# Altium PCB AS504D_Pcb.PcbDoc
Units mm, origin at the board's own origin, x right, y up, seen from the top; angles counter-clockwise.
Board outline 39.75 x 39.5 mm, 2 copper layers (Top Layer, Bottom Layer); 54 components, 7 nets, 234 pads, 0 vias.
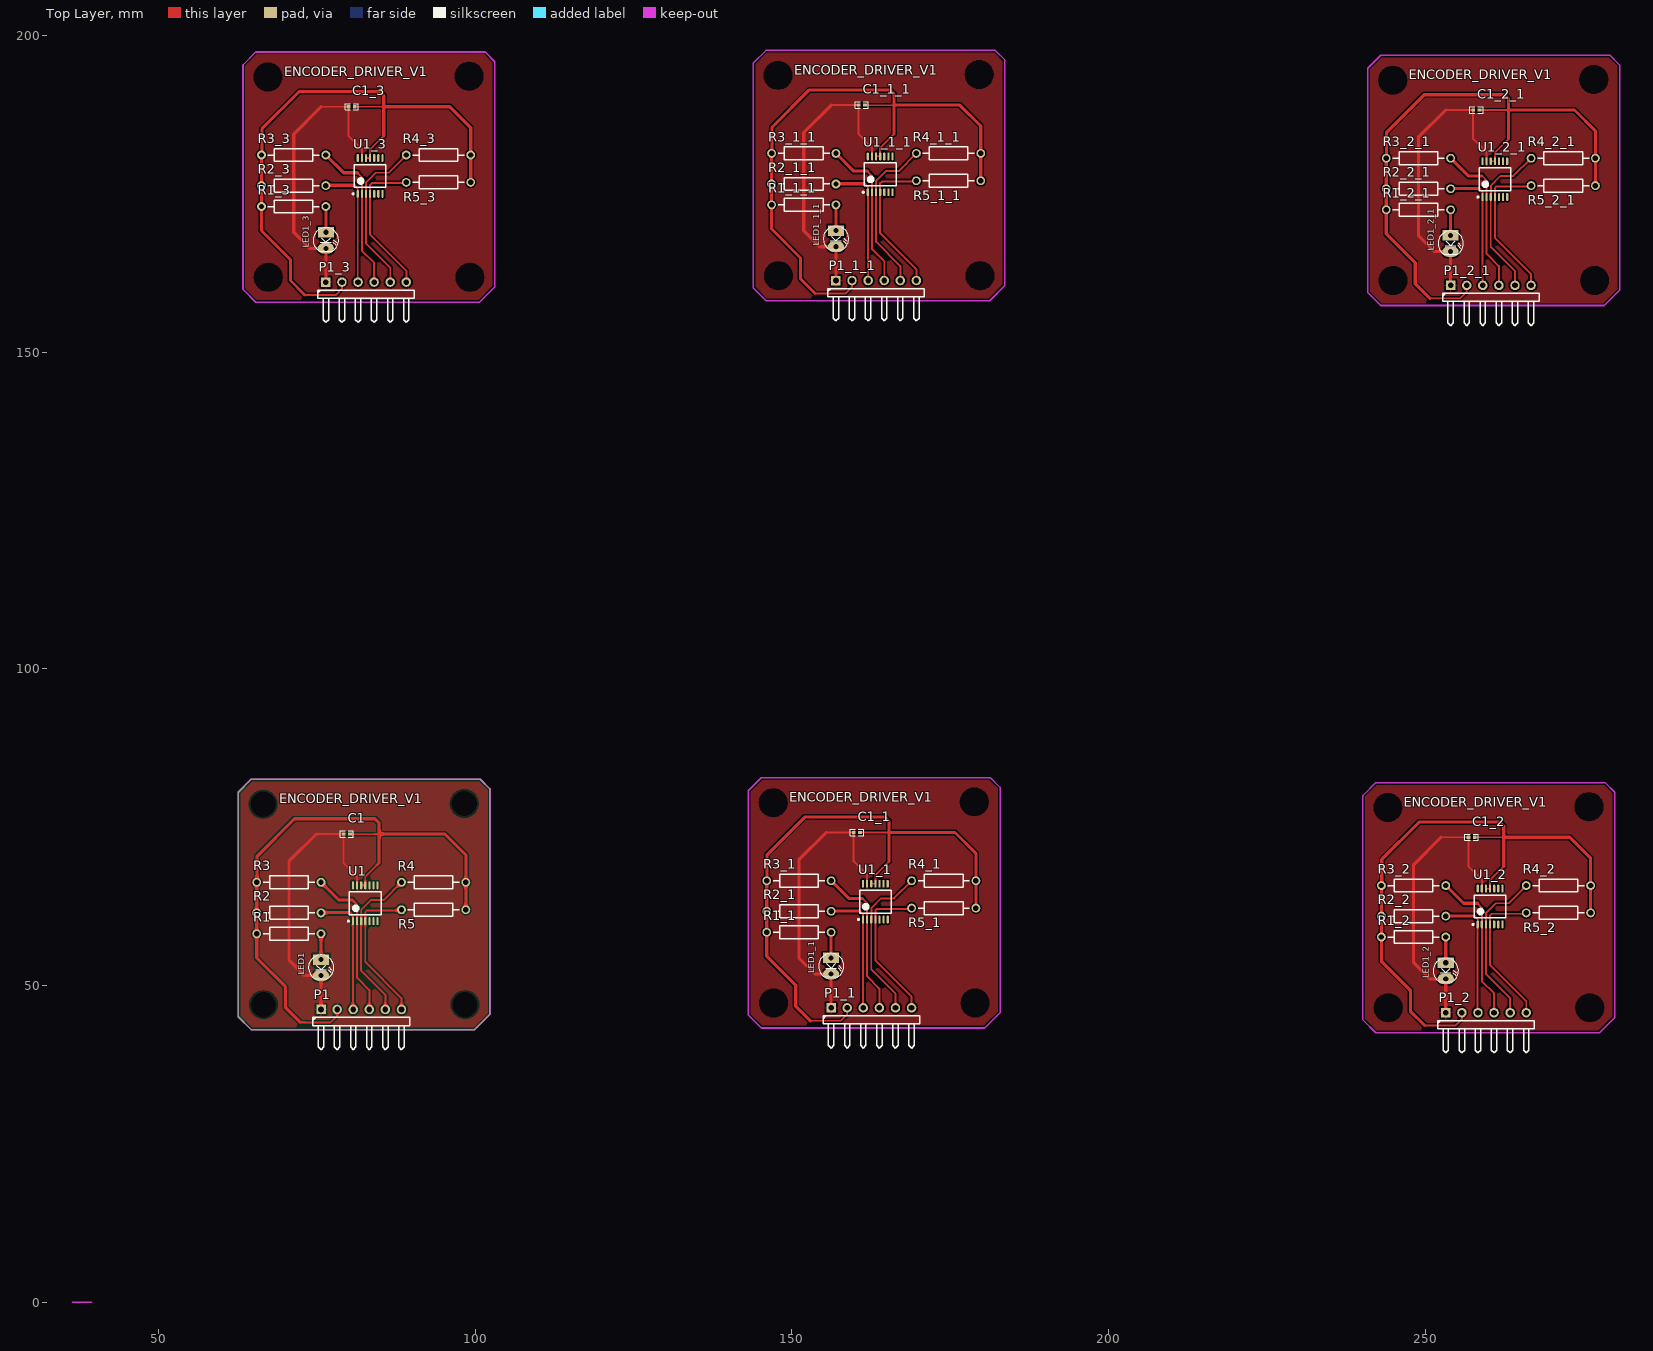
[diagram p0: Top Layer view]
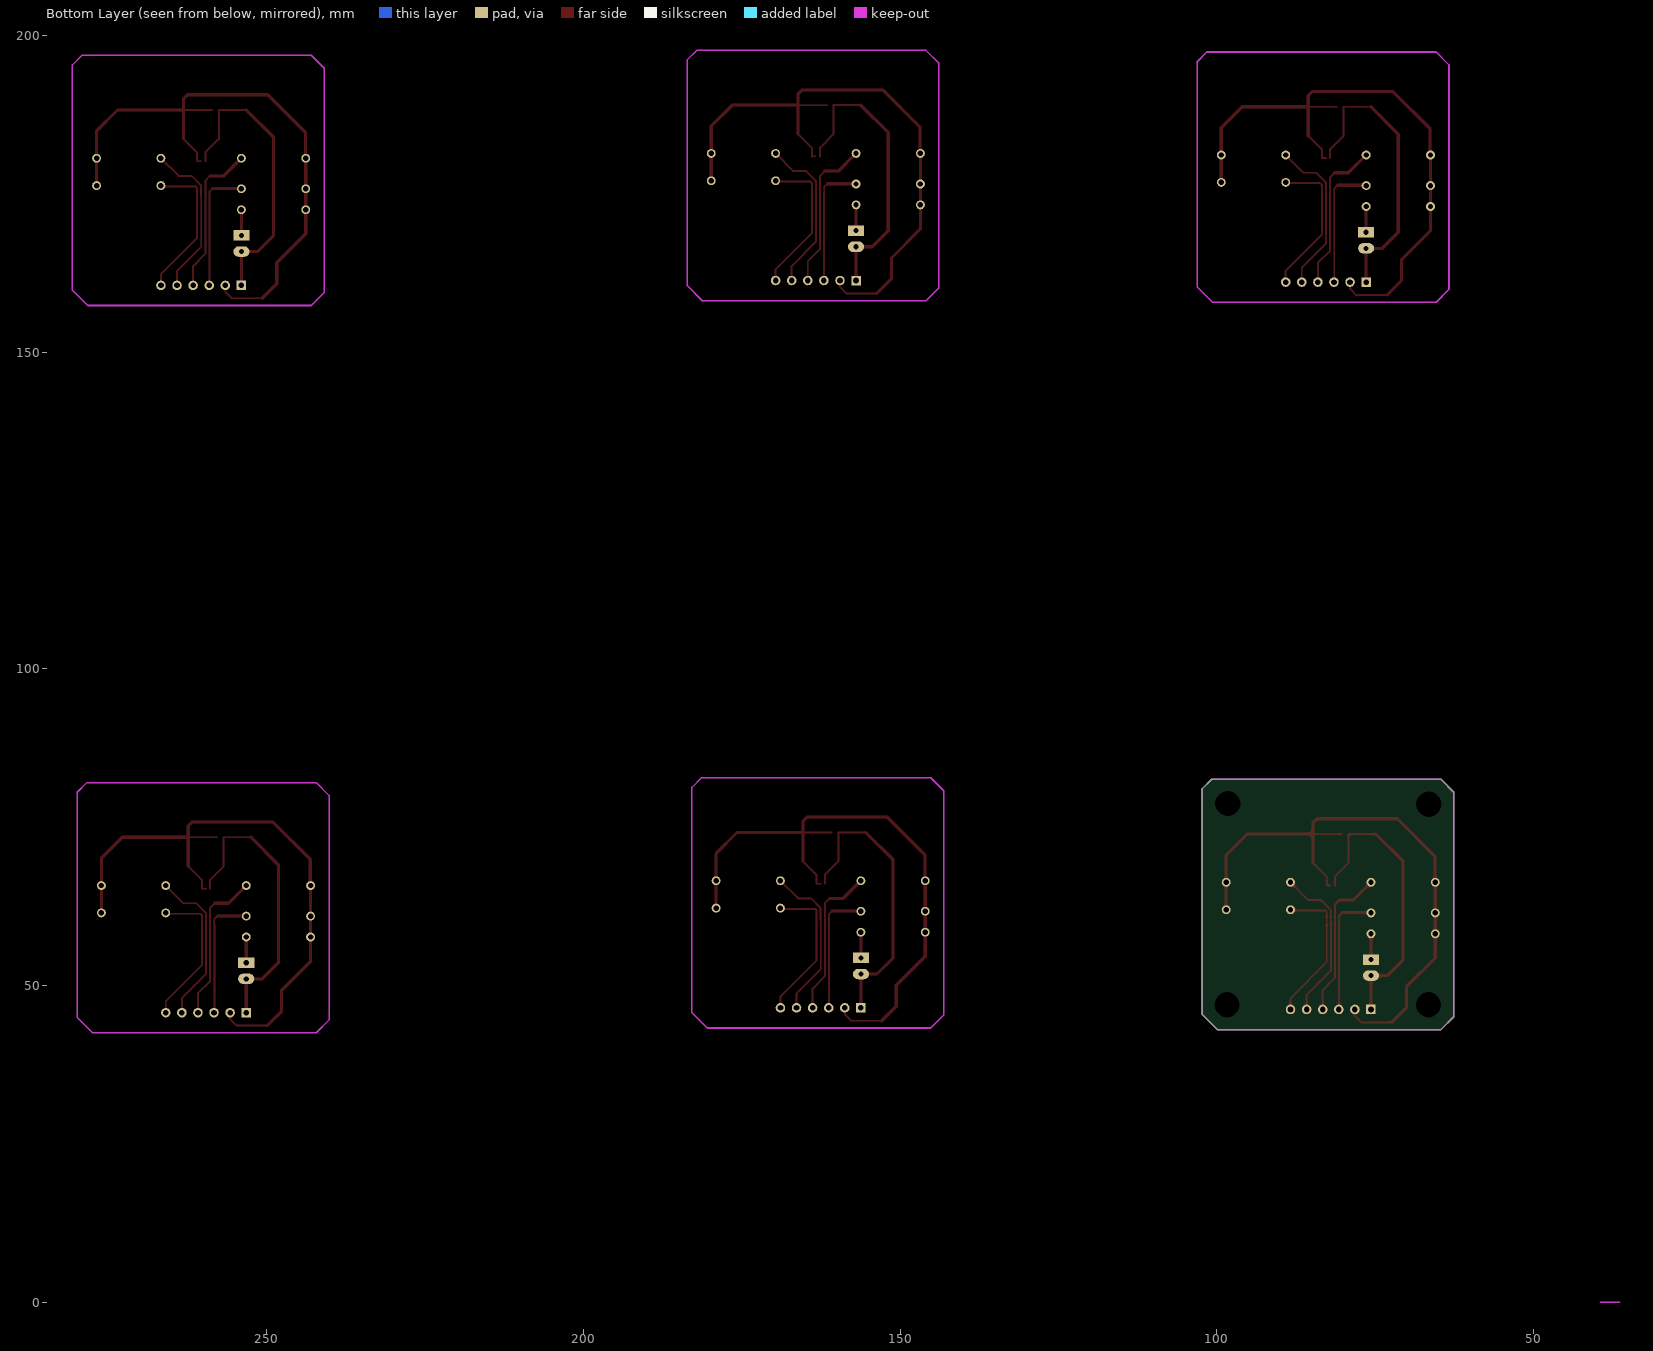
[diagram p1: Bottom Layer view, seen from below]

## Layer stack, top to bottom
Top Solder: solder mask 0.0102, Solder Resist, Dk 3.5
Top Layer: signal copper 0.0356
Dielectric1: dielectric 0.32, FR-4, Dk 4.8
Bottom Layer: signal copper 0.0356
Bottom Solder: solder mask 0.0102, Solder Resist, Dk 3.5

## Board outline
62.611,45.085 64.643,43.053 99.949,43.053 102.362,45.466 102.362,81.026 100.838,82.55 64.643,82.55 62.611,80.518

## Design rules (kind name [scope] priority, off if disabled: settings)
Clearance [All] p1: gap=0.254 ignorepadtopadclearanceinfootprint=FALSE except(0: Arc-Hole Track-Hole SMDPad-Hole THPad-Hole Via-Hole Fill-Hole Poly-Hole Region-Hole Text-Hole)
PolygonConnect [All] p1: connectstyle=Relief reliefconductorwidth=0.254 reliefentries=4 polygonreliefangle="90 Angle" airgapwidth=0.254
RoutingVias [All] p1: holewidth=0.711 width=1.27 viastyle="Through Hole" minholewidth=0.711 minwidth=1.27 maxholewidth=0.711 maxwidth=1.27
SolderMaskExpansion [All] p1: expansion=0.102
Width [All] p1: maxlimit=0.254 minlimit=0.254 preferedwidth=0.254
30 further rules are at their usual default settings.

## Classes and differential pairs
component class AS504D_Sch: C1 LED1 P1 R1 R2 R3 R4 R5 U1

## Components (designator, comment, footprint, x,y, rotation, side; value= is the part's Value field where it differs from the comment)
C1 "104" CAPC1005X55N 79.764,73.914 r0 top value=0.1uF
C1_1 "104" CAPC1005X55N 160.282,74.168 r0 top value=0.1uF (schematic designator C1)
C1_1_1 "104" CAPC1005X55N 161.044,188.976 r0 top value=0.1uF (schematic designator C1)
C1_2 "104" CAPC1005X55N 257.31,73.406 r0 top value=0.1uF (schematic designator C1)
C1_2_1 "104" CAPC1005X55N 258.072,188.214 r0 top value=0.1uF (schematic designator C1)
C1_3 "104" CAPC1005X55N 80.526,188.722 r0 top value=0.1uF (schematic designator C1)
LED1 "LED" LED-3 75.692,54.102 r270 top value="LED 3 ly Single Colour"
LED1_1 "LED" LED-3 156.21,54.356 r270 top value="LED 3 ly Single Colour" (schematic designator LED1)
LED1_1_1 "LED" LED-3 156.972,169.164 r270 top value="LED 3 ly Single Colour" (schematic designator LED1)
LED1_2 "LED" LED-3 253.238,53.594 r270 top value="LED 3 ly Single Colour" (schematic designator LED1)
LED1_2_1 "LED" LED-3 254,168.402 r270 top value="LED 3 ly Single Colour" (schematic designator LED1)
LED1_3 "LED" LED-3 76.454,168.91 r270 top value="LED 3 ly Single Colour" (schematic designator LED1)
P1 "Header 6H" HDR1X6H 75.692,46.228 r0 top
P1_1 "Header 6H" HDR1X6H 156.21,46.482 r0 top (schematic designator P1)
P1_1_1 "Header 6H" HDR1X6H 156.972,161.29 r0 top (schematic designator P1)
P1_2 "Header 6H" HDR1X6H 253.238,45.72 r0 top (schematic designator P1)
P1_2_1 "Header 6H" HDR1X6H 254,160.528 r0 top (schematic designator P1)
P1_3 "Header 6H" HDR1X6H 76.454,161.036 r0 top (schematic designator P1)
R1 "Res2" AXIAL-0.4 70.612,58.166 r180 top value=510R
R1_1 "Res2" AXIAL-0.4 151.13,58.42 r180 top value=510R (schematic designator R1)
R1_1_1 "Res2" AXIAL-0.4 151.892,173.228 r180 top value=510R (schematic designator R1)
R1_2 "Res2" AXIAL-0.4 248.158,57.658 r180 top value=510R (schematic designator R1)
R1_2_1 "Res2" AXIAL-0.4 248.92,172.466 r180 top value=510R (schematic designator R1)
R1_3 "Res2" AXIAL-0.4 71.374,172.974 r180 top value=510R (schematic designator R1)
R2 "Res2" AXIAL-0.4 70.612,61.468 r180 top value=4.7K
R2_1 "Res2" AXIAL-0.4 151.13,61.722 r180 top value=4.7K (schematic designator R2)
R2_1_1 "Res2" AXIAL-0.4 151.892,176.53 r180 top value=4.7K (schematic designator R2)
R2_2 "Res2" AXIAL-0.4 248.158,60.96 r180 top value=4.7K (schematic designator R2)
R2_2_1 "Res2" AXIAL-0.4 248.92,175.768 r180 top value=4.7K (schematic designator R2)
R2_3 "Res2" AXIAL-0.4 71.374,176.276 r180 top value=4.7K (schematic designator R2)
R3 "Res2" AXIAL-0.4 70.612,66.294 r180 top value=4.7K
R3_1 "Res2" AXIAL-0.4 151.13,66.548 r180 top value=4.7K (schematic designator R3)
R3_1_1 "Res2" AXIAL-0.4 151.892,181.356 r180 top value=4.7K (schematic designator R3)
R3_2 "Res2" AXIAL-0.4 248.158,65.786 r180 top value=4.7K (schematic designator R3)
R3_2_1 "Res2" AXIAL-0.4 248.92,180.594 r180 top value=4.7K (schematic designator R3)
R3_3 "Res2" AXIAL-0.4 71.374,181.102 r180 top value=4.7K (schematic designator R3)
R4 "Res2" AXIAL-0.4 93.472,66.294 r0 top value=4.7K
R4_1 "Res2" AXIAL-0.4 173.99,66.548 r0 top value=4.7K (schematic designator R4)
R4_1_1 "Res2" AXIAL-0.4 174.752,181.356 r0 top value=4.7K (schematic designator R4)
R4_2 "Res2" AXIAL-0.4 271.018,65.786 r0 top value=4.7K (schematic designator R4)
R4_2_1 "Res2" AXIAL-0.4 271.78,180.594 r0 top value=4.7K (schematic designator R4)
R4_3 "Res2" AXIAL-0.4 94.234,181.102 r0 top value=4.7K (schematic designator R4)
R5 "Res2" AXIAL-0.4 93.472,61.976 r0 top value=4.7K
R5_1 "Res2" AXIAL-0.4 173.99,62.23 r0 top value=4.7K (schematic designator R5)
R5_1_1 "Res2" AXIAL-0.4 174.752,177.038 r0 top value=4.7K (schematic designator R5)
R5_2 "Res2" AXIAL-0.4 271.018,61.468 r0 top value=4.7K (schematic designator R5)
R5_2_1 "Res2" AXIAL-0.4 271.78,176.276 r0 top value=4.7K (schematic designator R5)
R5_3 "Res2" AXIAL-0.4 94.234,176.784 r0 top value=4.7K (schematic designator R5)
U1 "AS5047D" TSSOP14 82.677,62.992 r90 top
U1_1 "AS5047D" TSSOP14 163.195,63.246 r90 top (schematic designator U1)
U1_1_1 "AS5047D" TSSOP14 163.957,178.054 r90 top (schematic designator U1)
U1_2 "AS5047D" TSSOP14 260.223,62.484 r90 top (schematic designator U1)
U1_2_1 "AS5047D" TSSOP14 260.985,177.292 r90 top (schematic designator U1)
U1_3 "AS5047D" TSSOP14 83.439,177.8 r90 top (schematic designator U1)

## Footprints (in the part's own frame and the unit in brackets; to place one, negate y for a bottom-side part, rotate by r counter-clockwise, add the part's x,y. Pads: shape width x height; smd on the part's side, far side on the other; paste and mask are expansions set on the pad)
AXIAL-0.4 [mm] "Axial Device, Thru-Hole; 2 Leads; 0.4 in Pin Spacing"
  round 1.4 hole 0.85: 1(-5.08,0) 2(5.08,0)
  silkscreen extent -4.06,-1.02 4.06,1.02
CAPC1005X55N [mm] "Chip Capacitor, Body 1.0x0.5mm, EIA 0402, IPC Medium Density"
  round 0.2 on Mech15: 0(0,0)
  rrect20% 0.6x0.5 smd: 1(-0.5,0) 2(0.5,0)
  Top Layer pour cut-out: -0.325,0.375 -0.2,0.5 0.2,0.5 0.325,0.375 0.325,-0.375 0.2,-0.5 -0.2,-0.5 -0.325,-0.375
  silkscreen extent -1.05,-0.5 1.05,0.5, body extent -0.52,-0.27 0.53,0.28, height 0.55
HDR1X6H [mm] "Connector; Header; 6 Position; Right Angle"
  rect 1.5x1.5 hole 0.9: 1(0,0)
  round 1.5 hole 0.9: 2(2.54,0) 3(5.08,0) 4(7.62,0) 5(10.16,0) 6(12.7,0)
  silkscreen extent -1.27,-6.35 13.97,-1.27
LED-3 [mil] "LED 2 PIN, 3ly Only colour"
  rect 65x100 hole 32: 1(0,0)
  oval 65x100 hole 32: 2(100,0)
  silkscreen extent -29,-78 118,79, body extent -25,-75 113,75, height 217
TSSOP14 [mm] "TSSOP, 14-Leads, Body 5.00x4.40mm, Pitch 0.65mm, IPC High Density"
  oval 1.25x0.35 smd: 1(-2.825,1.95) 2(-2.825,1.3) 3(-2.825,0.65) 4(-2.825,0) 5(-2.825,-0.65) 6(-2.825,-1.3) 7(-2.825,-1.95) 8(2.825,-1.95) 9(2.825,-1.3) 10(2.825,-0.65) 11(2.825,0) 12(2.825,0.65) 13(2.825,1.3) 14(2.825,1.95)
  silkscreen extent -2.95,-2.5 1.8,2.8, body extent -3.23,-2.55 3.23,2.55, height 1.25

## Part data
C1 C1_1 C1_1_1 C1_2 C1_2_1 C1_3: library part CN2, "Cap np 104 => 105pF"
LED1 LED1_1 LED1_1_1 LED1_2 LED1_2_1 LED1_3: "LED Single colour Green and Red"
P1 P1_1 P1_1_1 P1_2 P1_2_1 P1_3: "Header, 6-Pin, Right Angle", LatestRevisionDate=17-Jul-2002, LatestRevisionNote="Re-released for DXP Platform.", Publisher="Altium Limited"
R1 R1_1 R1_1_1 R1_2 R1_2_1 R1_3 R2 R2_1 R2_1_1 R2_2 R2_2_1 R2_3 R3 R3_1 R3_1_1 R3_2 R3_2_1 R3_3 R4 R4_1 R4_1_1 R4_2 R4_2_1 R4_3 R5 R5_1 R5_1_1 R5_2 R5_2_1 R5_3: "Resistor", LatestRevisionDate=17-Jul-2002, LatestRevisionNote="Re-released for DXP Platform.", PackageDescription="Axial Device, Thru-Hole; 2 Leads; 0.4 in Pin Spacing", PackageReference=AXIAL-0.4, Published=8-Jun-2000, Publisher="Altium Limited"
U1 U1_1 U1_1_1 U1_2 U1_2_1 U1_3: BOM_Manufacturer Part=?, Supplier Part Number 1=AS5047D-ATSMTR-ND, spicePre=U, Supplier 1=Digi-Key

## Free pads (board coordinates)
  round 1.524 hole 4: 0(66.548,78.613) 0(66.611,46.99) 0(67.31,193.421) 0(67.373,161.798) 0(98.298,78.74) 0(98.425,46.99) 0(99.06,193.548) 0(99.187,161.798) 0(147.066,78.867) 0(147.129,47.244) 0(147.828,193.675) 0(147.891,162.052) 0(178.816,78.994) 0(178.943,47.244) 0(179.578,193.802) 0(179.705,162.052) 0(244.094,78.105) 0(244.157,46.482) 0(244.856,192.913) 0(244.919,161.29) 0(275.844,78.232) 0(275.971,46.482) 0(276.606,193.04) 0(276.733,161.29)

## Nets (pads, with @x,y where several pads share a name; then routed paths per layer and width w, separated by ;. In a path a pad name is that pad's centre, name@x,y a point inside that pad or via, vN(x,y) a via of type N, cw(c..) or ccw(c..) an arc to the next point about the centre after c; other vN are vias at no path point)
CLK: P1.4 R3.1 U1.2 | length 24.5
  Top Layer w0.3: 80.645,63.5 81.377,62.768 U1.2 81.377,51.211 83.312,49.276 P1.4
  Top Layer w0.5: R3.1 78.486,63.5 80.645,63.5
CSN: P1.3 R2.1 U1.1 | length 20
  Top Layer w0.254: U1.1 80.727,61.005
  Top Layer w0.3: 80.219,61.513 80.727,61.005 ; P1.3@80.727,46.228 U1.1
  Top Layer w0.5: R2.1@75.692,61.513 80.219,61.513
GND: C1.1 LED1.2 P1.1 U1.13 | length 46.4
  Top Layer w0.3: 74.93,73.914 79.256,73.914 79.256,69.334 81.377,67.213 U1.13
  Top Layer w0.5: 74.93,73.914 70.612,69.596 70.612,54.102 73.152,51.562 LED1.2 P1.1
MISO: P1.5 R4.1 U1.3 | length 25.5
  Top Layer w0.254: U1.3 U1.3@82.042,60.182
  Top Layer w0.3: U1.3 82.027,52.339 85.852,48.514 P1.5 ; U1.3@82.042,60.182 82.042,61.976 83.566,63.5 85.598,63.5 R4.1
MOSI: P1.6 R5.1 U1.4 | length 23.6
  Top Layer w0.3: P1.6 88.392,48.006 82.677,53.721 U1.4 82.677,61.595 82.931,61.849 R5.1@88.392,61.849
NetLED1_1: LED1.1 R1.1 | length 4.1
  Top Layer w0.5: LED1.1 R1.1
VDD3V3: C1.2 P1.2 R1.2 R2.2 R3.2 R4.2 R5.2 U1.11 U1.12 | length 98
  Top Layer w0.254: R3.2 R3.2@65.596,66.358 ; C1.2 84.836,73.914 ; U1.12 U1.11
  Top Layer w0.3: 72.39,44.196 77.216,44.196 78.232,45.212 P1.2 ; U1.11 82.677,67.183 84.836,69.342
  Top Layer w0.5: R3.2 R2.2 R1.2 65.532,54.356 70.104,49.784 70.104,46.482 72.39,44.196 ; R3.2@65.596,66.358 65.596,70.421 71.501,76.327 84.201,76.327 84.836,75.692 84.836,73.914 ; 84.836,69.342 84.836,73.914 ; R5.2 R4.2 98.552,70.612 95.25,73.914 84.836,73.914
pads on no net: C1.0 C1_1.0 C1_1.1 C1_1.2 C1_1_1.0 C1_1_1.1 C1_1_1.2 C1_2.0 C1_2.1 C1_2.2 C1_2_1.0 C1_2_1.1 C1_2_1.2 C1_3.0 C1_3.1 C1_3.2 LED1_1.1 LED1_1.2 LED1_1_1.1 LED1_1_1.2 LED1_2.1 LED1_2.2 LED1_2_1.1 LED1_2_1.2 LED1_3.1 LED1_3.2 P1_1.1 P1_1.2 P1_1.3 P1_1.4 P1_1.5 P1_1.6 P1_1_1.1 P1_1_1.2 P1_1_1.3 P1_1_1.4 P1_1_1.5 P1_1_1.6 P1_2.1 P1_2.2 P1_2.3 P1_2.4 P1_2.5 P1_2.6 P1_2_1.1 P1_2_1.2 P1_2_1.3 P1_2_1.4 P1_2_1.5 P1_2_1.6 P1_3.1 P1_3.2 P1_3.3 P1_3.4 P1_3.5 P1_3.6 R1_1.1 R1_1.2 R1_1_1.1 R1_1_1.2 R1_2.1 R1_2.2 R1_2_1.1 R1_2_1.2 R1_3.1 R1_3.2 R2_1.1 R2_1.2 R2_1_1.1 R2_1_1.2 R2_2.1 R2_2.2 R2_2_1.1 R2_2_1.2 R2_3.1 R2_3.2 R3_1.1 R3_1.2 R3_1_1.1 R3_1_1.2 R3_2.1 R3_2.2 R3_2_1.1 R3_2_1.2 R3_3.1 R3_3.2 R4_1.1 R4_1.2 R4_1_1.1 R4_1_1.2 R4_2.1 R4_2.2 R4_2_1.1 R4_2_1.2 R4_3.1 R4_3.2 R5_1.1 R5_1.2 R5_1_1.1 R5_1_1.2 R5_2.1 R5_2.2 R5_2_1.1 R5_2_1.2 R5_3.1 R5_3.2 U1.5 U1.6 U1.7 U1.8 U1.9 U1.10 U1.14 U1_1.1 U1_1.2 U1_1.3 U1_1.4 U1_1.5 U1_1.6 U1_1.7 U1_1.8 U1_1.9 U1_1.10 U1_1.11 U1_1.12 U1_1.13 U1_1.14 U1_1_1.1 U1_1_1.2 U1_1_1.3 U1_1_1.4 U1_1_1.5 U1_1_1.6 U1_1_1.7 U1_1_1.8 U1_1_1.9 U1_1_1.10 U1_1_1.11 U1_1_1.12 U1_1_1.13 U1_1_1.14 U1_2.1 U1_2.2 U1_2.3 U1_2.4 U1_2.5 U1_2.6 U1_2.7 U1_2.8 U1_2.9 U1_2.10 U1_2.11 U1_2.12 U1_2.13 U1_2.14 U1_2_1.1 U1_2_1.2 U1_2_1.3 U1_2_1.4 U1_2_1.5 U1_2_1.6 U1_2_1.7 U1_2_1.8 U1_2_1.9 U1_2_1.10 U1_2_1.11 U1_2_1.12 U1_2_1.13 U1_2_1.14 U1_3.1 U1_3.2 U1_3.3 U1_3.4 U1_3.5 U1_3.6 U1_3.7 U1_3.8 U1_3.9 U1_3.10 U1_3.11 U1_3.12 U1_3.13 U1_3.14
copper on no net: | length 1210
  Top Layer w0.254: 66.294,181.102 66.358,181.165 ; 81.026,188.722 85.598,188.722 ; 81.489,174.975 81.489,175.813 ; 82.789,174.975 82.804,174.99 ; 82.789,180.625 83.439,180.625 ; 146.05,66.548 146.113,66.611 ; 146.812,181.356 146.875,181.419 ; 160.782,74.168 165.354,74.168 ; 161.245,60.421 161.245,61.259 ; 161.544,188.976 166.116,188.976 ; 162.007,175.229 162.007,176.067 ; 162.545,60.421 162.56,60.436 ; 162.545,66.071 163.195,66.071 ; 163.307,175.229 163.322,175.244 ; 163.307,180.879 163.957,180.879 ; 243.078,65.786 243.141,65.849 ; 243.84,180.594 243.903,180.657 ; 257.81,73.406 262.382,73.406 ; 258.273,59.659 258.273,60.497 ; 258.572,188.214 263.144,188.214 ; 259.035,174.467 259.035,175.305 ; 259.573,59.659 259.588,59.674 ; 259.573,65.309 260.223,65.309 ; 260.335,174.467 260.35,174.482 ; 260.335,180.117 260.985,180.117
  Top Layer w0.3: 73.152,159.004 77.978,159.004 78.994,160.02 78.994,161.036 ; 75.692,188.722 80.018,188.722 80.018,184.142 82.139,182.021 82.139,180.625 ; 80.981,176.321 81.489,175.813 ; 81.407,178.308 82.139,177.576 82.139,174.975 82.139,166.019 84.074,164.084 84.074,161.036 ; 81.489,161.036 81.489,174.975 ; 82.789,174.975 82.789,167.147 86.614,163.322 86.614,161.036 ; 82.804,174.99 82.804,176.784 84.328,178.308 86.36,178.308 89.154,181.102 ; 83.439,180.625 83.439,181.991 85.598,184.15 ; 89.154,161.036 89.154,162.814 83.439,168.529 83.439,174.975 83.439,176.403 83.693,176.657 89.154,176.657 ; 152.908,44.45 157.734,44.45 158.75,45.466 158.75,46.482 ; 153.67,159.258 158.496,159.258 159.512,160.274 159.512,161.29 ; 155.448,74.168 159.774,74.168 159.774,69.588 161.895,67.467 161.895,66.071 ; 156.21,188.976 160.536,188.976 160.536,184.396 162.657,182.275 162.657,180.879 ; 160.737,61.767 161.245,61.259 ; 161.163,63.754 161.895,63.022 161.895,60.421 161.895,51.465 163.83,49.53 163.83,46.482 ; 161.245,46.482 161.245,60.421 ; 161.499,176.575 162.007,176.067 ; 161.925,178.562 162.657,177.83 162.657,175.229 162.657,166.273 164.592,164.338 164.592,161.29 ; 162.007,161.29 162.007,175.229 ; 162.545,60.421 162.545,52.593 166.37,48.768 166.37,46.482 ; 162.56,60.436 162.56,62.23 164.084,63.754 166.116,63.754 168.91,66.548 ; 163.195,66.071 163.195,67.437 165.354,69.596 ; 163.307,175.229 163.307,167.401 167.132,163.576 167.132,161.29 ; 163.322,175.244 163.322,177.038 164.846,178.562 166.878,178.562 169.672,181.356 ; 163.957,180.879 163.957,182.245 166.116,184.404 ; 168.91,46.482 168.91,48.26 163.195,53.975 163.195,60.421 163.195,61.849 163.449,62.103 168.91,62.103 ; 169.672,161.29 169.672,163.068 163.957,168.783 163.957,175.229 163.957,176.657 164.211,176.911 169.672,176.911 ; 249.936,43.688 254.762,43.688 255.778,44.704 255.778,45.72 ; 250.698,158.496 255.524,158.496 256.54,159.512 256.54,160.528 ; 252.476,73.406 256.802,73.406 256.802,68.826 258.923,66.705 258.923,65.309 ; 253.238,188.214 257.564,188.214 257.564,183.634 259.685,181.513 259.685,180.117 ; 257.765,61.005 258.273,60.497 ; 258.191,62.992 258.923,62.26 258.923,59.659 258.923,50.703 260.858,48.768 260.858,45.72 ; 258.273,45.72 258.273,59.659 ; 258.527,175.813 259.035,175.305 ; 258.953,177.8 259.685,177.068 259.685,174.467 259.685,165.511 261.62,163.576 261.62,160.528 ; 259.035,160.528 259.035,174.467 ; 259.573,59.659 259.573,51.831 263.398,48.006 263.398,45.72 ; 259.588,59.674 259.588,61.468 261.112,62.992 263.144,62.992 265.938,65.786 ; 260.223,65.309 260.223,66.675 262.382,68.834 ; 260.335,174.467 260.335,166.639 264.16,162.814 264.16,160.528 ; 260.35,174.482 260.35,176.276 261.874,177.8 263.906,177.8 266.7,180.594 ; 260.985,180.117 260.985,181.483 263.144,183.642 ; 265.938,45.72 265.938,47.498 260.223,53.213 260.223,59.659 260.223,61.087 260.477,61.341 265.938,61.341 ; 266.7,160.528 266.7,162.306 260.985,168.021 260.985,174.467 260.985,175.895 261.239,176.149 266.7,176.149
  Top Layer w0.5: 66.294,181.102 66.294,176.276 66.294,172.974 66.294,169.164 70.866,164.592 70.866,161.29 73.152,159.004 ; 66.358,181.165 66.358,185.23 72.263,191.135 84.963,191.135 85.598,190.5 85.598,188.722 ; 75.692,188.722 71.374,184.404 71.374,168.91 73.914,166.37 76.454,166.37 76.454,161.036 ; 76.454,168.91 76.454,172.974 ; 76.454,176.321 80.981,176.321 ; 76.454,181.102 79.248,178.308 81.407,178.308 ; 85.598,184.15 85.598,188.722 ; 99.314,176.784 99.314,181.102 99.314,185.42 96.012,188.722 85.598,188.722 ; 146.05,66.548 146.05,61.722 146.05,58.42 146.05,54.61 150.622,50.038 150.622,46.736 152.908,44.45 ; 146.113,66.611 146.113,70.675 152.019,76.581 164.719,76.581 165.354,75.946 165.354,74.168 ; 146.812,181.356 146.812,176.53 146.812,173.228 146.812,169.418 151.384,164.846 151.384,161.544 153.67,159.258 ; 146.875,181.419 146.875,185.483 152.781,191.389 165.481,191.389 166.116,190.754 166.116,188.976 ; 155.448,74.168 151.13,69.85 151.13,54.356 153.67,51.816 156.21,51.816 156.21,46.482 ; 156.21,54.356 156.21,58.42 ; 156.21,61.767 160.737,61.767 ; 156.21,66.548 159.004,63.754 161.163,63.754 ; 156.21,188.976 151.892,184.658 151.892,169.164 154.432,166.624 156.972,166.624 156.972,161.29 ; 156.972,169.164 156.972,173.228 ; 156.972,176.575 161.499,176.575 ; 156.972,181.356 159.766,178.562 161.925,178.562 ; 165.354,69.596 165.354,74.168 ; 166.116,184.404 166.116,188.976 ; 179.07,62.23 179.07,66.548 179.07,70.866 175.768,74.168 165.354,74.168 ; 179.832,177.038 179.832,181.356 179.832,185.674 176.53,188.976 166.116,188.976 ; 243.078,65.786 243.078,60.96 243.078,57.658 243.078,53.848 247.65,49.276 247.65,45.974 249.936,43.688 ; 243.141,65.849 243.141,69.913 249.047,75.819 261.747,75.819 262.382,75.184 262.382,73.406 ; 243.84,180.594 243.84,175.768 243.84,172.466 243.84,168.656 248.412,164.084 248.412,160.782 250.698,158.496 ; 243.903,180.657 243.903,184.721 249.809,190.627 262.509,190.627 263.144,189.992 263.144,188.214 ; 252.476,73.406 248.158,69.088 248.158,53.594 250.698,51.054 253.238,51.054 253.238,45.72 ; 253.238,53.594 253.238,57.658 ; 253.238,61.005 257.765,61.005 ; 253.238,65.786 256.032,62.992 258.191,62.992 ; 253.238,188.214 248.92,183.896 248.92,168.402 251.46,165.862 254,165.862 254,160.528 ; 254,168.402 254,172.466 ; 254,175.813 258.527,175.813 ; 254,180.594 256.794,177.8 258.953,177.8 ; 262.382,68.834 262.382,73.406 ; 263.144,183.642 263.144,188.214 ; 276.098,61.468 276.098,65.786 276.098,70.104 272.796,73.406 262.382,73.406 ; 276.86,176.276 276.86,180.594 276.86,184.912 273.558,188.214 263.144,188.214

## Polygon pours and split planes (outlines as drawn)
no net on Top Layer "Keep-Out Layer-No Net" (solid, pour order 74): 241.046,194.818 242.824,196.596 278.892,196.596 279.146,196.85 280.67,195.326 280.67,159.766 278.257,157.353 243.205,157.353 243.078,157.226 240.919,159.385 240.919,194.818
no net on Top Layer "Keep-Out Layer-No Net" (solid, pour order 72): 240.284,80.01 242.062,81.788 278.13,81.788 278.384,82.042 279.908,80.518 279.908,44.958 277.495,42.545 242.443,42.545 242.316,42.418 240.157,44.577 240.157,80.01
no net on Top Layer "Keep-Out Layer-No Net" (solid, pour order 70): 143.256,80.772 145.034,82.55 181.102,82.55 181.356,82.804 182.88,81.28 182.88,45.72 180.467,43.307 145.415,43.307 145.288,43.18 143.129,45.339 143.129,80.772
no net on Top Layer "Keep-Out Layer-No Net" (solid, pour order 66): 144.018,195.58 145.796,197.358 181.864,197.358 182.118,197.612 183.642,196.088 183.642,160.528 181.229,158.115 146.177,158.115 146.05,157.988 143.891,160.147 143.891,195.58
no net on Top Layer "Keep-Out Layer-No Net" (solid, pour order 50): 63.5,195.326 65.278,197.104 101.346,197.104 101.6,197.358 103.124,195.834 103.124,160.274 100.711,157.861 65.659,157.861 65.532,157.734 63.373,159.893 63.373,195.326
GND on Top Layer "Keep-Out Layer-No Net" (solid, pour order 38): 62.738,80.518 64.516,82.296 100.584,82.296 100.838,82.55 102.362,81.026 102.362,45.466 99.949,43.053 64.897,43.053 64.77,42.926 62.611,45.085 62.611,80.518

## Keep-outs
Keep-Out Layer:
  lines w0.254: 36.449,0 39.497,0 ; 62.611,45.085 64.643,43.053 99.949,43.053 102.362,45.466 102.362,81.026 100.838,82.55 64.77,82.55 64.643,82.55 62.611,80.518 62.611,45.085 ; 63.373,159.893 65.405,157.861 100.711,157.861 103.124,160.274 103.124,195.834 101.6,197.358 65.532,197.358 65.405,197.358 63.373,195.326 63.373,159.893 ; 143.129,45.339 145.161,43.307 180.467,43.307 182.88,45.72 182.88,81.28 181.356,82.804 145.288,82.804 145.161,82.804 143.129,80.772 143.129,45.339 ; 143.891,160.147 145.923,158.115 181.229,158.115 183.642,160.528 183.642,196.088 182.118,197.612 146.05,197.612 145.923,197.612 143.891,195.58 143.891,160.147 ; 240.157,44.577 240.157,80.01 242.189,82.042 242.316,82.042 278.384,82.042 279.908,80.518 279.908,44.958 277.495,42.545 242.189,42.545 240.157,44.577 ; 240.919,159.385 240.919,194.818 242.951,196.85 243.078,196.85 279.146,196.85 280.67,195.326 280.67,159.766 278.257,157.353 242.951,157.353 240.919,159.385

## Silkscreen, mask and mechanical layers (free items; w line width, h text height)
Top Overlay:
  text "ENCODER_DRIVER_V1" at 150.368,193.802 h1.52
  text "ENCODER_DRIVER_V1" at 69.85,193.548 h1.52
  text "ENCODER_DRIVER_V1" at 247.396,193.04 h1.52
  text "ENCODER_DRIVER_V1" at 149.606,78.994 h1.52
  text "ENCODER_DRIVER_V1" at 69.088,78.74 h1.52
  text "ENCODER_DRIVER_V1" at 246.634,78.232 h1.52